# Altium PCB SafetyStatus_Board(2025).PcbDoc
Units mm, origin at the board's own origin, x right, y up, seen from the top; angles counter-clockwise.
Board outline 15 x 35 mm, 2 copper layers (Top Layer, Bottom Layer); 49 components, 28 nets, 104 pads, 6 vias.
Unrouted connection lines stored in the file: 79.
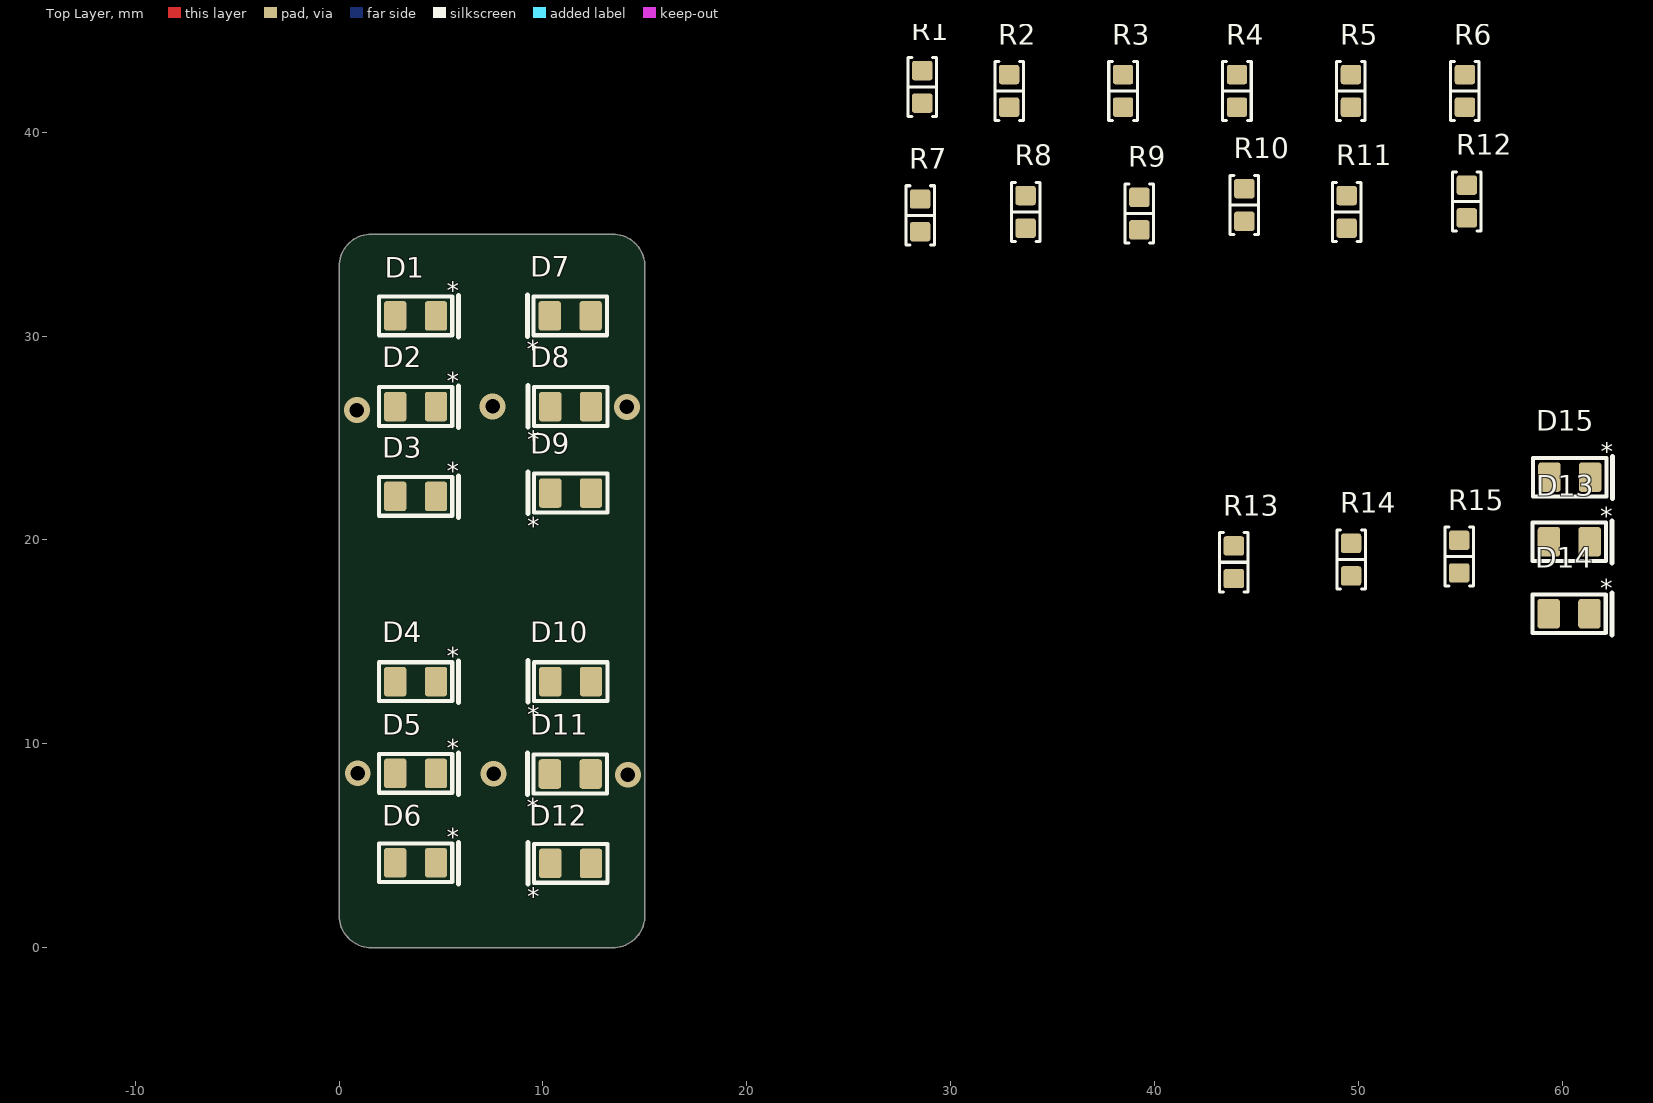
[diagram p0: Top Layer view]
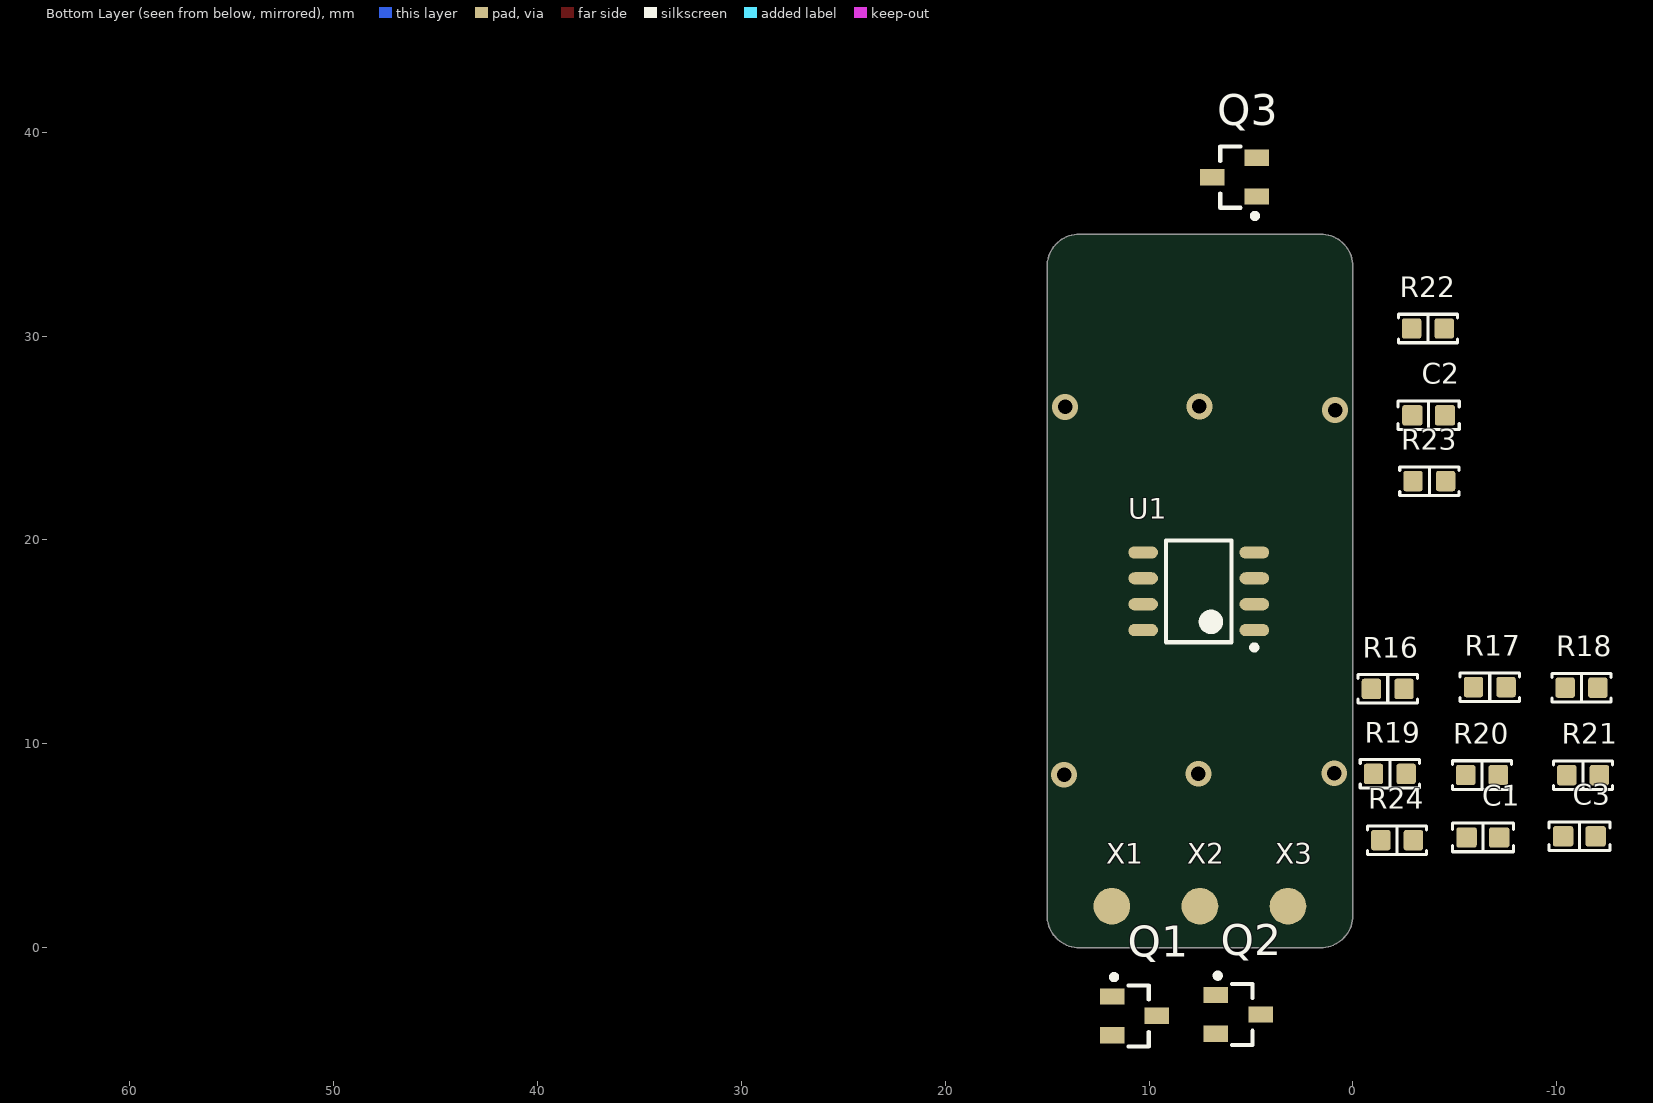
[diagram p1: Bottom Layer view, seen from below]

## Layer stack, top to bottom
Top Solder: solder mask 0.0102, Solder Resist, Dk 3.5
Top Layer: signal copper 0.0356
Dielectric 1: dielectric 0.32, FR-4, Dk 4.8
Bottom Layer: signal copper 0.0356
Bottom Solder: solder mask 0.0102, Solder Resist, Dk 3.5

## Board outline
1.592,0 13.408,0 ccw(c13.408,1.592) 15,1.592 15,33.407 ccw(c13.407,33.407) 13.407,35 1.592,35 ccw(c1.592,33.408) 0,33.408 0,1.592 ccw(c1.592,1.592)

## Design rules (kind name [scope] priority, off if disabled: settings)
Clearance [All] p1: gap=0.254 ignorepadtopadclearanceinfootprint=FALSE
PolygonConnect [All] p1: connectstyle=Relief reliefconductorwidth=0.254 reliefentries=4 polygonreliefangle="90 Angle" airgapwidth=0.254
RoomDefinition SafetyStatus(2025) [InComponentClass('SafetyStatus(2025)')] p1: confinementstyle=ConfineIn formatcopy=TRUE lockcomponents=FALSE outline -102.362,-70.104 -51.562,-70.104 -51.562,-44.704 -102.362,-44.704
RoutingVias [All] p1: holewidth=0.711 width=1.27 viastyle="Through Hole" minholewidth=0.711 minwidth=1.27 maxholewidth=0.711 maxwidth=1.27
SolderMaskExpansion [All] p1: expansion=0.102 istentingtop=FALSE
SupplyNets "Schematic Supply Nets_1" [InNet('GND-PIN')] p1: voltage=0.000
SupplyNets "Schematic Supply Nets" [InNet('+12')] p2: voltage=0.000
Width [All] p1: maxlimit=0.254 minlimit=0.254 preferedwidth=0.254
30 further rules are at their usual default settings.

## Classes and differential pairs
component class U_RGB_LEDs: D1 D2 D3 D4 D5 D6 D7 D8 D9 D10 D11 D12 D13 D14 D15 R1 R3 R4 R5 R6 R7 R9 R10 R11 R12 R13 R14 R17 R23
component class SafetyStatus(2025): C1 C2 C3 Q1 Q2 Q3 R6 R7 R9 R10 R11 R12 R13 R17 R23 U1 X1 X2 X3

## Components (designator, comment, footprint, x,y, rotation, side; value= is the part's Value field where it differs from the comment)
C1 "1u" 0603_CAP -6.374,5.411 r180 bottom
C2 "1u" 0603_CAP -3.716,26.111 r180 bottom
C3 "10n" 0603_CAP -11.107,5.467 r180 bottom
D1 "0805_LED" 0805_LED 3.751,30.989 r0 top
D2 "0805_LED" 0805_LED 3.751,26.542 r0 top
D3 "0805_LED" 0805_LED 3.751,22.137 r0 top
D4 "0805_LED" 0805_LED 3.751,13.054 r0 top
D5 "0805_LED" 0805_LED 3.751,8.554 r0 top
D6 "0805_LED" 0805_LED 3.751,4.173 r0 top
D7 "0805_LED" 0805_LED 11.336,30.988 r180 top
D8 "0805_LED" 0805_LED 11.356,26.542 r180 top
D9 "0805_LED" 0805_LED 11.356,22.301 r180 top
D10 "0805_LED" 0805_LED 11.356,13.054 r180 top
D11 "0805_LED" 0805_LED 11.336,8.522 r180 top
D12 "0805_LED" 0805_LED 11.356,4.141 r180 top
D13 "0805_LED" 0805_LED 60.333,19.916 r0 top
D14 "0805_LED" 0805_LED 60.319,16.385 r0 top
D15 "0805_LED" 0805_LED 60.357,23.08 r0 top
Q1 "DMG2302UK-7" SOT23-3 10.712,-3.34 r180 bottom
Q2 "DMG2302UK-7" SOT23-3 5.63,-3.268 r180 bottom
Q3 "DMG2302UK-7" SOT23-3 5.806,37.791 r0 bottom
R1 "Resistor" 0603_RES 28.599,42.218 r90 top value=500
R2 "Resistor" 0603_RES 32.859,42.023 r90 top value=500
R3 "Resistor" 0603_RES 38.447,42.023 r90 top value=500
R4 "Resistor" 0603_RES 44.035,42.023 r90 top value=500
R5 "Resistor" 0603_RES 49.623,42.023 r90 top value=500
R6 "Resistor" 0603_RES 55.211,42.023 r90 top value=500
R7 "Resistor" 0603_RES 28.496,35.921 r90 top value=500
R8 "Resistor" 0603_RES 33.668,36.09 r90 top value=500
R9 "Resistor" 0603_RES 39.243,36.006 r90 top value=500
R10 "Resistor" 0603_RES 44.394,36.428 r90 top value=500
R11 "Resistor" 0603_RES 49.416,36.09 r90 top value=500
R12 "Resistor" 0603_RES 55.304,36.597 r90 top value=500
R13 "Resistor" 0603_RES 43.879,18.908 r90 top value=500
R14 "Resistor" 0603_RES 49.63,19.038 r90 top value=500
R15 "Resistor" 0603_RES 54.932,19.183 r90 top value=500
R16 "1k" 0603_RES -1.707,12.695 r180 bottom
R17 "100k" 0603_RES -6.711,12.784 r180 bottom
R18 "220" 0603_RES -11.212,12.755 r180 bottom
R19 "100k" 0603_RES -1.81,8.529 r180 bottom
R20 "10k" 0603_RES -6.329,8.472 r180 bottom
R21 "Resistor" 0603_RES -11.287,8.466 r180 bottom value=100k
R22 "220" 0603_RES -3.677,30.371 r180 bottom
R23 "100k" 0603_RES -3.747,22.888 r180 bottom
R24 "100k" 0603_RES -2.166,5.279 r180 bottom
U1 "555 Timer" SOIC-8 7.561,17.484 r0 bottom
X1 "GenericPinHeader(0.1in)" GenericPinHeader(.1in) 11.822,2.039 r180 bottom
X2 "GenericPinHeader(0.1in)" GenericPinHeader(.1in) 7.504,2.039 r180 bottom
X3 "GenericPinHeader(0.1in)" GenericPinHeader(.1in) 3.186,2.039 r180 bottom

## Footprints (in the part's own frame and the unit in brackets; to place one, negate y for a bottom-side part, rotate by r counter-clockwise, add the part's x,y. Pads: shape width x height; smd on the part's side, far side on the other; paste and mask are expansions set on the pad)
0603_CAP [mm]
  rrect25% 1x1 smd: 1(-0.8,0) 2(0.8,0)
  silkscreen extent -1.5,-0.7 1.5,0.7, body extent -0.8,-0.41 0.8,0.41, height 0.82
0603_RES [mm] "Chip Resistor, 2-Leads, Body 1.60x0.80mm, IPC Medium Density"
  rrect25% 0.95x1 smd: 1(-0.8,0) 2(0.8,0)
  silkscreen extent -1.45,-0.7 1.45,0.7, body extent -0.8,-0.4 0.8,0.4, height 0.45
0805_LED [mm]
  rrect25% 1.1x1.45 smd: 1(-1,0) 2(1,0)
  silkscreen extent -1.8,-1.03 2.1,1, body extent -1.05,-0.67 1.05,0.68, height 0.9
GenericPinHeader(.1in) [mm] "Generic .1in (2.54mm) pin header"
  round 1.8 smd: 1(0,0)
  body extent -1.27,-1.27 1.27,1.27, height 9.5
SOIC-8 [mm] "SOIC, 8-Leads, Body 4.90x3.90mm, Pitch 1.27mm, IPC Medium Density"
  oval 1.45x0.6 smd: 1(-2.725,1.905) 2(-2.725,0.635) 3(-2.725,-0.635) 4(-2.725,-1.905) 5(2.725,-1.905) 6(2.725,-0.635) 7(2.725,0.635) 8(2.725,1.905)
  silkscreen extent -2.85,-2.5 1.6,2.88, body extent -3,-2.5 3,2.5, height 1.75
SOT23-3 [mm] "SOT23, 3-Leads, Body 2.92x2.37mm, Pitch 0.95mm, IPC Medium Density, NUP2105L"
  rect 1.2x0.8 smd: 1(-1.1,0.95) 2(-1.1,-0.95) 3(1.1,0)
  silkscreen extent -1.13,-1.5 0.7,2.02, body extent -1.5,-1.5 1.5,1.5, height 1.25

## Part data
C1 C2 C3: library part Capacitor
D1 D2 D3 D4 D5 D6 D7 D8 D9 D10 D11 D12 D13 D14 D15: "Generic 0805 LED"
Q1 Q2 Q3: "MOSFET N-CH 20V 2.8A SOT23", Continuous Drain Current=2.8A, Drain To Source Breakdown Voltage=20V, Drain To Source Resistance=61mΩ, Gate To Source Voltage=12V, Input Capacitace At Vds="130pF @ 10V", Manufacturer="Diodes Inc.", Max Forward Diode Voltage=1.2V, Max Junction Temp=+150°C, Package=SOT23, Power Dissipation=0.66W, Pulse Drain Current=12A, Temperature="-55°C to +150°C", Temperature Range Low=-55°C, Typ Forward Diode Voltage=0.7V, Automotive=Yes, Automotive Grade="Grade 0", Category=Trans, ComponentLink2Description=Datasheet, ComponentLink2URL=https://www.diodes.com/assets/Datasheets/DMG2302UK.pdf, Depletion Mode=False, Device Class L1="Discrete Semiconductors", Device Class L2=Transistors, Device Class L3=MOSFETs, Digikey Description="MOSFET N-CH 20V 2.8A SOT23", Drain To Source Voltage=20V, Footprint Url=https://www.diodes.com/assets/Package-Files/SOT23.pdf, Gate Charge At Vgs="2.8nC @ 10V", Height=1.1mm, Lead Free=Yes, Manufacturer Part Number=DMG2302UK-7, Number Of Channels=1, Number Of N Channels=1, Octopart=https://octopart.com/dmg2302uk-7-diodes+inc.-73850182, Reverse Recovery Charge=0.5nC, Reverse Recovery Time=5.3ns, RoHS=TRUE, Rthja Max=192°C/W, Standoff Height=0.013mm, Temperature Range High=+150°C, Threshold Vgs Max=1V, Threshold Vgs Min=0.3V, Turn Off Delay Time=4.2ns, Turn On Delay Time=0.6ns
R16 R17 R18 R19 R20 R22 R23 R24: library part Resistor
U1: library part LM555, "Generic 555 timer IC", ComponentLink1Description=Digikey, ComponentLink1URL=https://www.digikey.com/en/products/detail/texas-instruments/NA555DR/1571933
X1 X2 X3: "Generic .1in(2.54mm) pitch pin header"

## Via types
v1: diameter 1.27, hole 0.711, Top Layer to Bottom Layer, 6 vias

## Nets (pads, with @x,y where several pads share a name; then routed paths per layer and width w, separated by ;. In a path a pad name is that pad's centre, name@x,y a point inside that pad or via, vN(x,y) a via of type N, cw(c..) or ccw(c..) an arc to the next point about the centre after c; other vN are vias at no path point)
555-OUTPUT: R22.1 U1.3
+12: R1.2 R2.2 R3.2 R4.2 R5.2 R6.2 R7.2 R8.2 R9.2 R10.2 R11.2 R12.2 R13.2 R14.2 R15.2 R16.1 X2.1
  other v1: 14.16,8.484 0.916,8.561 0.872,26.365 14.119,26.522
GND-PIN: C1.1 C2.1 C3.1 Q1.2 Q2.2 Q3.2 R17.2 R19.2 R23.2 U1.1 X3.1
Green: D4.2 D5.2 D6.2 D10.2 D11.2 D12.2 Q1.3
  other v1: 7.582,8.533
NetC2_2: C2.2 R24.1 U1.2 U1.6
NetC3_2: C3.2 U1.5
NetD1_1: D1.1 R1.1
NetD2_1: D2.1 R2.1
NetD3_1: D3.1 R3.1
NetD4_1: D4.1 R4.1
NetD5_1: D5.1 R5.1
NetD6_1: D6.1 R6.1
NetD7_1: D7.1 R7.1
NetD8_1: D8.1 R8.1
NetD9_1: D9.1 R9.1
NetD10_1: D10.1 R10.1
NetD11_1: D11.1 R11.1
NetD12_1: D12.1 R12.1
NetD13_1: D13.1 R13.1
NetD14_1: D14.1 R14.1
NetD15_1: D15.1 R15.1
NetQ2_1: Q2.1 R18.2 R19.1
NetQ3_1: Q3.1 R22.2 R23.1
NetR20_1: R20.1 R21.2 U1.7
NetR21_1: R21.1 R24.2
NOT-TO-RED-FET: Q1.1 Q2.3 R16.2 R17.1
Red: D1.2 D2.2 D3.2 D7.2 D8.2 D9.2 Q3.3
  other v1: 7.528,26.554
"SafetyStatus Signal": C1.2 R18.1 R20.2 U1.4 U1.8 X1.1
pads on no net: D13.2 D14.2 D15.2

## Text inside footprints (layer, text, board x,y; h text height)
D1: Top Overlay "*" at 5.275,31.497 h1.52
D2: Top Overlay "*" at 5.275,27.05 h1.52
D3: Top Overlay "*" at 5.275,22.645 h1.52
D4: Top Overlay "*" at 5.275,13.562 h1.52
D5: Top Overlay "*" at 5.275,9.062 h1.52
D6: Top Overlay "*" at 5.275,4.681 h1.52
D7: Top Overlay "*" at 9.812,30.48 h1.52 r180
D8: Top Overlay "*" at 9.832,26.034 h1.52 r180
D9: Top Overlay "*" at 9.832,21.793 h1.52 r180
D10: Top Overlay "*" at 9.832,12.546 h1.52 r180
D11: Top Overlay "*" at 9.812,8.014 h1.52 r180
D12: Top Overlay "*" at 9.832,3.633 h1.52 r180
D13: Top Overlay "*" at 61.857,20.424 h1.52
D14: Top Overlay "*" at 61.843,16.893 h1.52
D15: Top Overlay "*" at 61.881,23.588 h1.52